# Altium PCB ORD_PCB.PcbDoc
Units mm, origin at the board's own origin, x right, y up, seen from the top; angles counter-clockwise.
Board outline 90 x 60 mm, 2 copper layers (Top Layer, Bottom Layer); 130 components, 93 nets, 389 pads, 0 vias.
Unrouted connection lines stored in the file: 263.
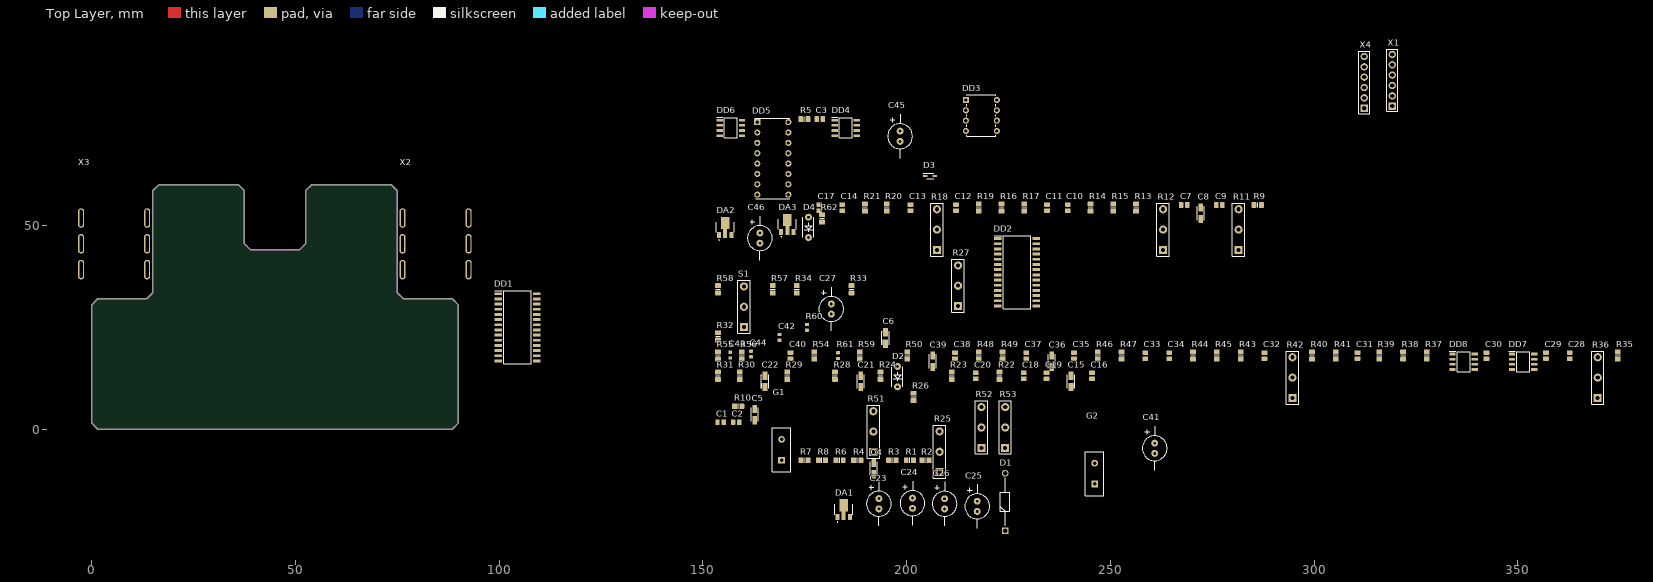
[diagram p0: Top Layer view]
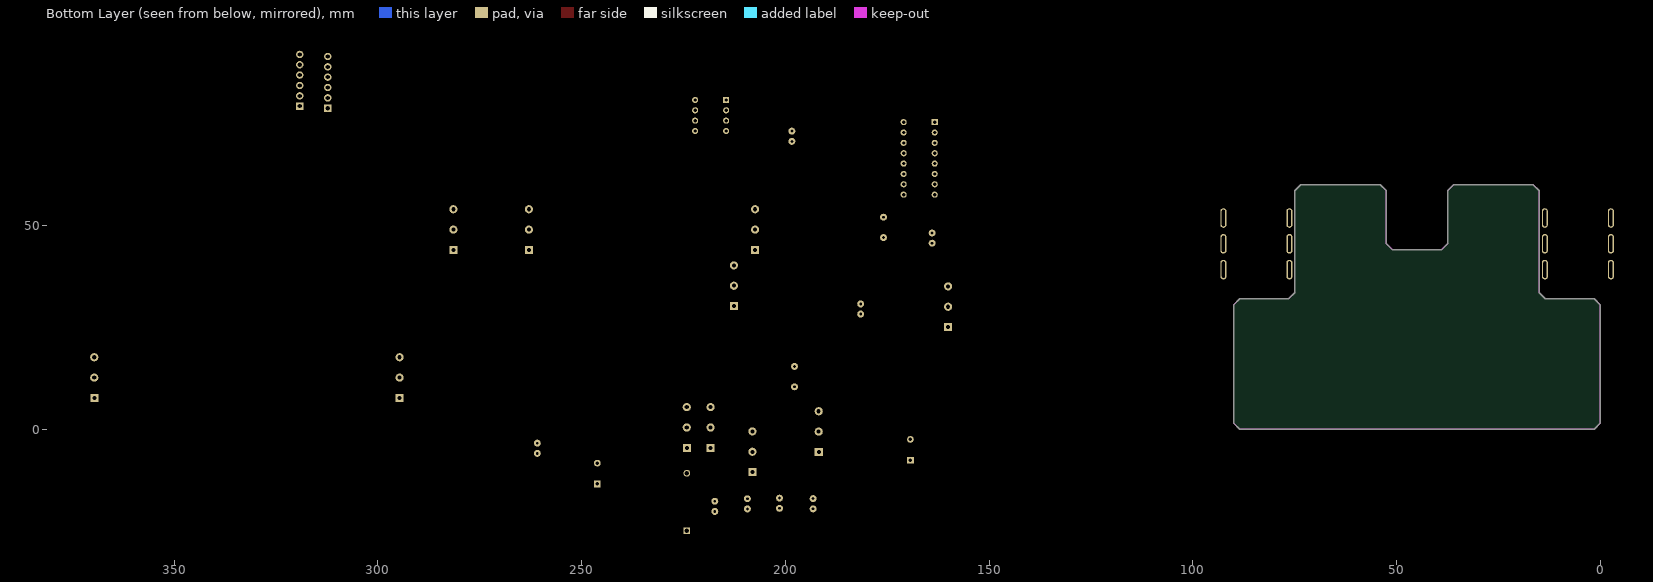
[diagram p1: Bottom Layer view, seen from below]

## Layer stack, top to bottom
Top Solder: solder mask 0.0102, Solder Resist, Dk 3.5
Top Layer: signal copper 0.0356
Dielectric 1: dielectric 0.32, FR-4, Dk 4.8
Bottom Layer: signal copper 0.0356
Bottom Solder: solder mask 0.0102, Solder Resist, Dk 3.5

## Board outline
1.5,0 0,1.5 0,30.5 1.5,32 13.5,32 15,33.5 15,58.5 16.5,60 36,60 37.5,58.5 37.5,45.5 39,44 51,44 52.5,45.5 52.5,58.5 54,60 73.5,60 75,58.5 75,33.5 76.5,32 88.5,32 90,30.5 90,1.5 88.5,0

## Design rules (kind name [scope] priority, off if disabled: settings)
Clearance [All] p1: gap=0.254 ignorepadtopadclearanceinfootprint=FALSE except(0: Arc-Hole Track-Hole SMDPad-Hole THPad-Hole Via-Hole Fill-Hole Poly-Hole Region-Hole Text-Hole)
PolygonConnect [All] p1: connectstyle=Relief reliefconductorwidth=0.254 reliefentries=4 polygonreliefangle="90 Angle" airgapwidth=0.254
RoutingVias [All] p1: holewidth=0.711 width=1.27 viastyle="Through Hole" minholewidth=0.711 minwidth=1.27 maxholewidth=0.711 maxwidth=1.27
SolderMaskExpansion [All] p1: expansion=0.102
Width [All] p1: maxlimit=0.254 minlimit=0.254 preferedwidth=0.254
30 further rules are at their usual default settings.

## Classes and differential pairs
component class ORD_CONNECTORS: X1 X2 X3 X4
component class ORD_PT2399: C1 C2 C3 C4 C5 C6 C7 C8 C9 C10 C11 C12 C13 C14 C15 C16 C17 C18 C19 C20 C21 C22 DD4 DD5 DD6 R1 R2 R3 R4 R5 R6 R7 R8 R9 R10 R11 R12 R13 R14 R15 R16 R17 R18 R19 R20 R21 R22 R23 R24 R25 R26 R27 R28 R29 R30 R31 R32
component class ORD_POWER: C23 C24 C25 C26 C27 C41 C45 C46 D1 D4 DA1 DA2 DA3 R33 R34 R57 R58 R62
component class ORD_FV1: C28 C29 C30 C31 C32 C33 C34 C35 C36 C37 C38 C39 C40 D3 DD2 DD3 DD7 DD8 G1 R35 R36 R37 R38 R39 R40 R41 R42 R43 R44 R45 R46 R47 R48 R49 R50 R51 R52 R53 R54 R55 R56 S1
component class ORD_CH341A: C42 C43 C44 D2 DD1 G2 R59 R60 R61

## Components (designator, comment, footprint, x,y, rotation, side; value= is the part's Value field where it differs from the comment)
C1 "47 pF" C0805[2012] 154.34,1.686 r0 top
C2 "100 pF" C0805[2012] 158.15,1.686 r0 top
C3 "22 nF" C0805[2012] 178.724,76.108 r0 top
C4 "1 uF" C3216_CASE-A 191.932,-9.657 r90 top
C5 "1 uF" C3216_CASE-A 162.722,3.591 r90 top
C6 "1 uF" C3216_CASE-A 194.853,22.387 r90 top
C7 "4.7 nF" C0805[2012] 268.132,55.026 r0 top
C8 "1 uF" C3216_CASE-A 272.196,52.994 r90 top
C9 "47 nF" C0805[2012] 276.768,55.026 r0 top
C10 "2.2 nF" C0805[2012] 239.557,54.391 r90 top
C11 "22 nF" C0805[2012] 234.477,54.391 r90 top
C12 "2.2 nF" C0805[2012] 212.125,54.391 r90 top
C13 "100 nF" C0805[2012] 200.949,54.391 r90 top
C14 "100 nF" C0805[2012] 184.185,54.391 r90 top
C15 "47 uF" C3216_CASE-A 240.319,11.719 r90 top
C16 "100 nF" C0805[2012] 245.526,13.116 r90 top
C17 "100 nF" C0805[2012] 178.597,54.391 r90 top
C18 "10 nF" C0805[2012] 228.762,13.116 r90 top
C19 "10 nF" C0805[2012] 234.35,13.116 r90 top
C20 "10 nF" C0805[2012] 216.951,13.116 r90 top
C21 "4.7 uF" C3216_CASE-A 188.757,11.719 r90 top
C22 "10 uF" C3216_CASE-A 165.262,11.719 r90 top
C23 "100 uF" K50-35 193.202,-18.293 r90 top
C24 "100 uF" K50-35 201.457,-18.166 r90 top
C25 "100 uF" K50-35 217.332,-18.928 r90 top
C26 "100 uF" K50-35 209.331,-18.313 r90 top
C27 "47 uF" K50-35 181.518,29.499 r90 top
C28 "470 pF" C0805[2012] 362.747,18.069 r90 top
C29 "220 pF" C0805[2012] 356.905,18.069 r90 top
C30 "1 uF" C0805[2012] 342.3,18.069 r90 top
C31 "1 uF" C0805[2012] 310.677,18.069 r90 top
C32 "1 uF" C0805[2012] 287.817,18.069 r90 top
C33 "1 uF" C0805[2012] 258.607,18.069 r90 top
C34 "1 uF" C0805[2012] 264.449,18.069 r90 top
C35 "100 nF" C0805[2012] 241.081,18.069 r90 top
C36 "1 uF" C3216_CASE-A 235.62,16.672 r90 top
C37 "2.2 nF" C0805[2012] 229.397,18.069 r90 top
C38 "1 nF" C0805[2012] 211.871,18.069 r90 top
C39 "1 uF" C3216_CASE-A 206.41,16.672 r90 top
C40 "15 pF" C0805[2012] 171.485,18.069 r90 top
C41 "47 uF" K50-35 260.893,-4.684 r90 top
C42 "4.7 nF" C0603[1608] 168.818,22.514 r90 top
C43 "32 pF" C0603[1608] 156.753,18.196 r90 top
C44 "32 pF" C0603[1608] 161.833,18.45 r90 top
C45 "100 uF" K50-35 198.409,71.897 r90 top
C46 "100 uF" K50-35 163.992,46.898 r90 top
D1 "1N4007" DIOAD1410W90L470D235 224.19,-24.9 r90 top
D2 "Led" LED 197.774,15.477 r90 top
D3 "BAT60A" SOD323 205.775,62.138 r0 top
D4 "Led" LED 175.93,52.105 r90 top
DA1 "L78L05ABUTR" SOT-89 184.566,-19.944 r0 top
DA2 "L78L33ABUTR" SOT-89 155.483,49.311 r0 top
DA3 "L78L33ABUTR" SOT-89 170.723,50.073 r0 top
DD1 "CH341A" SOIC28 104.5,25 r0 top
DD2 "FV-1" SOIC28 227.102,38.516 r0 top
DD3 "24LC32A" DIP8_WITH_SOCKET 222.158,73.187 r0 top
DD4 "TL072CDR" SO8 185.074,73.949 r0 top
DD5 "PT2399" DIP16_with_Socket 167.167,66.456 r0 top
DD6 "LM358DT" SO8 156.88,73.949 r0 top
DD7 "TL072CDR" SO8 351.317,16.545 r0 top
DD8 "TL072CDR" SO8 336.712,16.545 r0 top
G1 "32768 MHz" HC-49 169.326,-7.605 r90 top
G2 "12.000 MHz" HC-49 246.161,-13.427 r90 top
R1 "360 kOhm" R0805[2012] 200.822,-7.625 r0 top
R2 "12 kOhm" R0805[2012] 204.632,-7.625 r0 top
R3 "180 kOhm" R0805[2012] 196.504,-7.625 r0 top
R4 "22 kOhm" R0805[2012] 187.868,-7.625 r0 top
R5 "1 MOhm" R0805[2012] 174.914,76.108 r0 top
R6 "1 kOhm" R0805[2012] 183.55,-7.625 r0 top
R7 "22 kOhm" R0805[2012] 174.914,-7.625 r0 top
R8 "100 kOhm" R0805[2012] 179.232,-7.625 r0 top
R9 "2.2 kOhm" R0805[2012] 286.166,55.026 r0 top
R10 "15 kOhm" R0805[2012] 158.658,5.623 r0 top
R11 "B50K" 16K1 281.467,43.977 r90 top
R12 "B50K" 16K1 262.925,43.977 r90 top
R13 "10 kOhm" R0805[2012] 256.321,54.391 r90 top
R14 "10 kOhm" R0805[2012] 245.145,54.391 r90 top
R15 "1 kOhm" R0805[2012] 250.733,54.391 r90 top
R16 "22 kOhm" R0805[2012] 223.301,54.391 r90 top
R17 "5.1 kOhm" R0805[2012] 228.889,54.391 r90 top
R18 "B50K" 16K1 207.426,43.977 r90 top
R19 "10 kOhm" R0805[2012] 217.713,54.391 r90 top
R20 "10 kOhm" R0805[2012] 195.107,54.391 r90 top
R21 "1 kOhm" R0805[2012] 189.773,54.391 r90 top
R22 "220 kOhm" R0805[2012] 222.793,13.116 r90 top
R23 "120 kOhm" R0805[2012] 211.109,13.116 r90 top
R24 "4.7 kOhm" R0805[2012] 193.583,13.116 r90 top
R25 "B50K" 16K1 208.061,-10.546 r90 top
R26 "100 kOhm" R0805[2012] 201.711,7.909 r90 top
R27 "B100K" 16K1 212.608,30.214 r90 top
R28 "4.7 kOhm" R0805[2012] 182.407,13.116 r90 top
R29 "220 kOhm" R0805[2012] 170.723,13.116 r90 top
R30 "220 kOhm" R0805[2012] 159.039,13.116 r90 top
R31 "120 kOhm" R0805[2012] 153.705,13.116 r90 top
R32 "0 Ohm" R0805[2012] 153.705,22.768 r90 top
R33 "10 kOhm" R0805[2012] 186.471,34.325 r90 top
R34 "10 kOhm" R0805[2012] 173.009,34.325 r90 top
R35 "22 kOhm" R0805[2012] 374.558,18.069 r90 top
R36 "B100K" 16K1 369.605,7.655 r90 top
R37 "100 Ohm" R0805[2012] 327.695,18.069 r90 top
R38 "15 kOhm" R0805[2012] 321.853,18.069 r90 top
R39 "100 kOhm" R0805[2012] 316.011,18.069 r90 top
R40 "15 kOhm" R0805[2012] 299.501,18.069 r90 top
R41 "15 kOhm" R0805[2012] 305.343,18.069 r90 top
R42 "B10K" 16K1 294.675,7.655 r90 top
R43 "100 kOhm" R0805[2012] 281.975,18.069 r90 top
R44 "15 kOhm" R0805[2012] 270.291,18.069 r90 top
R45 "15 kOhm" R0805[2012] 276.133,18.069 r90 top
R46 "1 kOhm" R0805[2012] 246.923,18.069 r90 top
R47 "1 kOhm" R0805[2012] 252.765,18.069 r90 top
R48 "1 MOhm" R0805[2012] 217.713,18.069 r90 top
R49 "1 MOhm" R0805[2012] 223.555,18.069 r90 top
R50 "100 Ohm" R0805[2012] 200.187,18.069 r90 top
R51 "B10K" 16K1 191.805,-5.593 r90 top
R52 "B10K" 16K1 218.348,-4.577 r90 top
R53 "B10K" 16K1 224.19,-4.577 r90 top
R54 "1 kOhm" R0805[2012] 177.327,18.069 r90 top
R55 "10 kOhm" R0805[2012] 153.705,18.069 r90 top
R56 "10 kOhm" R0805[2012] 159.547,18.069 r90 top
R57 "10 kOhm" R0805[2012] 167.167,34.325 r90 top
R58 "10 kOhm" R0805[2012] 153.705,34.325 r90 top
R59 "2.2 kOhm" R0805[2012] 188.503,18.069 r90 top
R60 "0 Ohm" R0603[1608] 175.549,24.992 r90 top
R61 "300 Ohm" R0603[1608] 183.169,18.069 r90 top
R62 "300 Ohm" R0805[2012] 179.232,51.724 r90 top
S1 "MTS-103" MTS-103 160.055,25.054 r90 top
X1 "Bypass Delay" "BYPASS PANEL" 319.186,79.283 r90 top
X2 "Audio Jack 6.35 mm" "audio jack" 84.4,45.5 r0 top
X3 "Audio Jack 6.35 mm" "audio jack" 5.5,45.5 r0 top
X4 "Bypass Reverb" "BYPASS PANEL" 312.328,78.775 r90 top

## Footprints (in the part's own frame and the unit in brackets; to place one, negate y for a bottom-side part, rotate by r counter-clockwise, add the part's x,y. Pads: shape width x height; smd on the part's side, far side on the other; paste and mask are expansions set on the pad)
16K1 [mm]
  rect 2x2 hole 1: 1(0,0)
  round 2 hole 1: 2(5,-0.025) 3(10,-0.025)
  silkscreen extent -1.5,-1.55 11.5,1.5
"audio jack" [mm] "Audio Jack 6.35 mm"
  oval 1.5x4.8 hole 0.7 slot 4 at 90 deg: 1(-8.1,6.33) 2(8.1,6.33) 3(-8.1,0) 4(8.1,0) 5(-8.1,-6.33) 6(8.1,-6.33)
  body extent -9.1,-13.28 9.1,18.51, height 15.94
"BYPASS PANEL" [mm]
  rect 1.8x1.8 hole 1: 1(0,0)
  round 1.8 hole 1: 2(2.54,0) 3(5.08,0) 4(7.62,0) 5(10.16,0) 6(12.7,0)
  silkscreen extent -1.3,-1.3 13.95,1.3
C0603[1608] [mm] "Capacitor C0603[1608]"
  rrect25% 0.8x0.9 smd: 1(-0.7,0) 2(0.7,0)
  body extent -0.8,-0.4 0.8,0.4, height 0.8
C0805[2012] [mm] "Capacitor C0805[2012]"
  rrect25% 1.1x1.4 smd: 1(-0.75,0) 2(0.75,0)
  body extent -1,-0.62 1,0.63, height 0.9
C3216_CASE-A [mm] "Capacitor, SM Tantalum; Body 3.2 x 1.6 mm (LxW typ)"
  rect 2x1.2 smd: 1(-1.4,0) 2(1.4,0)
  silkscreen extent -1.7,-0.9 1.7,0.9, body extent -1.7,-0.84 1.7,0.84, height 1.71
DIOAD1410W90L470D235 [mm]
  rect 1.65x1.65 / inner round 1.65 / far side rect 1.65x1.65 hole 1.1: 1(0,0)
  round 1.65 hole 1.1: 2(14.1,0)
  silkscreen extent 1.17,-1.17 12.93,1.17, body extent -0.45,-1.35 14.55,1.35, height 2.69
DIP8_WITH_SOCKET [mm]
  rect 1.5x1.5 hole 0.8: 1(-7.62,7.62)
  round 1.5 hole 0.8: 2(-7.62,5.08) 3(-7.62,2.54) 4(-7.62,0) 5(0,0) 6(0,2.54) 7(0,5.08) 8(0,7.62)
  silkscreen extent -7.37,-1.27 -0.25,8.89, body extent -8.76,-1.21 1.14,8.89, height 7.36
DIP16_with_Socket [mm]
  rect 1.5x1.5 hole 0.8: 1(-3.81,8.89)
  round 1.5 hole 0.8: 2(-3.81,6.35) 3(-3.81,3.81) 4(-3.81,1.27) 5(-3.81,-1.27) 6(-3.81,-3.81) 7(-3.81,-6.35) 8(-3.81,-8.89) 9(3.81,-8.89) 10(3.81,-6.35) 11(3.81,-3.81) 12(3.81,-1.27) 13(3.81,1.27) 14(3.81,3.81) 15(3.81,6.35) 16(3.81,8.89)
  silkscreen extent -4.39,-9.84 4.13,9.84, body extent -5.31,-10.25 5.19,10.16, height 7.78
HC-49 [mm]
  rect 1.65x1.65 / inner round 1.65 / far side rect 1.65x1.65 hole 0.9: 1(0,0)
  round 1.65 hole 0.9: 2(5.1,0)
  silkscreen extent -2.85,-2.27 7.95,2.27, body extent -2.86,-2.25 7.94,2.25, height 3.5
K50-35 [mm]
  round 1.7 hole 0.7: 1(-1.25,0) 2(1.25,0)
  silkscreen extent -5.38,-3.05 5.38,3.05, body extent -3.18,-3.15 3.13,3.15, height 7.5
LED [mm]
  round 1.7 hole 0.7: 1(-5.075,0) 2(-0.075,0)
  silkscreen extent -5,-1.32 -0.15,1.4
MTS-103 [mm] "Switch ON-OFF-ON"
  rect 2x2 hole 1: 1(0,0)
  round 2 hole 1: 2(5,-0.025) 3(10,-0.025)
  silkscreen extent -1.5,-1.55 11.5,1.5
R0603[1608] [mm] "Resistor R0603[1608]"
  rrect25% 0.8x0.9 smd: 1(-0.7,0) 2(0.7,0)
  body extent -0.8,-0.4 0.8,0.4, height 0.45
R0805[2012] [mm] "Resistor R0805[2012]"
  rrect25% 1.2x1.4 smd: 1(-0.9,0) 2(0.9,0)
  silkscreen extent 0,-0.6 0,0.6, body extent -1,-0.62 1,0.63, height 0.6
SO8 [mm]
  rect 1.525x0.65 smd: 1(-2.712,1.905) 2(-2.712,0.635) 3(-2.712,-0.635) 4(-2.712,-1.905) 5(2.712,-1.905) 6(2.712,-0.635) 7(2.712,0.635) 8(2.712,1.905)
  silkscreen extent -3.47,-2.45 1.6,2.58, body extent -3,-2.45 3,2.45, height 1.75
SOD323 [mm]
  rect 1.1x0.5 smd: 1(-1.15,0) 2(1.15,0)
  silkscreen extent -1.7,-0.63 0.85,0.63, body extent -1.25,-0.63 1.25,0.62, height 0.99
SOIC28 [mm]
  rect 1.87x0.7 smd: 1(-4.69,8.255) 2(-4.69,6.985) 3(-4.69,5.715) 4(-4.69,4.445) 5(-4.69,3.175) 6(-4.69,1.905) 7(-4.69,0.635) 8(-4.69,-0.635) 9(-4.69,-1.905) 10(-4.69,-3.175) 11(-4.69,-4.445) 12(-4.69,-5.715) 13(-4.69,-6.985) 14(-4.69,-8.255) 15(4.69,-8.255) 16(4.69,-6.985) 17(4.69,-5.715) 18(4.69,-4.445) 19(4.69,-3.175) 20(4.69,-1.905) 21(4.69,-0.635) 22(4.69,0.635) 23(4.69,1.905) 24(4.69,3.175) 25(4.69,4.445) 26(4.69,5.715) 27(4.69,6.985) 28(4.69,8.255)
  silkscreen extent -5.63,-8.94 3.4,8.96, body extent -5.15,-8.95 5.15,8.95, height 2.65
SOT-89 [mm]
  rect 1x1.5 smd: 1(-1.5,-1.65) 3(1.5,-1.65)
  rect 1x2.2 smd: 2(0,-1.3)
  rect 2x3 smd: 4(0,1.3)
  silkscreen extent -2.25,-2.9 2.25,1.5, body extent -2.25,-1.6 2.25,2.7, height 1.51

## Part data
C1 C2 C3 C7 C9 C10 C11 C12 C13 C14 C16 C17 C18 C19 C20 C28 C29 C30 C31 C32 C33 C34 C35 C37 C38 C40 C42 C43 C44: library part Capacitor
C4 C5 C6 C8 C15 C21 C22 C23 C24 C25 C26 C27 C36 C39 C41 C45 C46: library part Capacitor_Pol
D3: "Diode Schottky 10V 3A Automotive 2-Pin SOD-323 T/R", Arrow Part Number=BAT60A, Manufacturer_Part_Number=BAT60A
DA1: "Standard Regulator Pos 5V 0.1A L78L05ABUTR, Single Linear Voltage Regulator, 100mA 5 V, 3-Pin SOT-89", Manufacturer_Name="New Japan Radio", Manufacturer_Part_Number=NJM78L05UA-TE1, RS Part Number=7139502P, Allied_Number=R1030699, Allied Price/Stock=https://www.alliedelec.com/new-japan-radio-njm78l05ua-te1/R1030699/, Datasheet Link=http://uk.rs-online.com/web/p/products/7139502, RS Price/Stock=http://uk.rs-online.com/web/p/products/7139502P
DA2 DA3: "Standard Regulator Pos 3.3V 0.1A L78L33ABUTR, Single Linear Voltage Regulator, 100mA 3.3 V, 3-Pin SOT-89", Manufacturer_Name="New Japan Radio", Manufacturer_Part_Number=NJM78L05UA-TE1, RS Part Number=7139502P, Allied_Number=R1030699, Allied Price/Stock=https://www.alliedelec.com/new-japan-radio-njm78l05ua-te1/R1030699/, Datasheet Link=http://uk.rs-online.com/web/p/products/7139502, RS Price/Stock=http://uk.rs-online.com/web/p/products/7139502P
DD1: "USB Bus Convert Chip CH341A", Manufacturer_Name="Spin Semiconductor", Manufacturer_Part_Number="FV-1 Reverb IC", Datasheet Link=http://www.spinsemi.com/Products/datasheets/spn1001/FV-1.pdf, Geometry.Height=2.51mm
DD2: "FV-1 Reverb IC, Integrated Stereo ADC & DAC, Integrated Circuit, SOIC-28 300 MIL", Manufacturer_Name="Spin Semiconductor", Manufacturer_Part_Number="FV-1 Reverb IC", Datasheet Link=http://www.spinsemi.com/Products/datasheets/spn1001/FV-1.pdf, Geometry.Height=2.51mm
DD3: "32K I2C Serial EEPROM with Quarter-Array Write-Protect", Manufacturer_Name=Microchip, Manufacturer_Part_Number=24LC32AF-I/P, Mouser Part Number=579-24LC32AF-I/P, Allied_Number=70570177, Allied Price/Stock=https://www.alliedelec.com/microchip-technology-inc-24lc32af-i-p/70570177/, Mouser Price/Stock=https://www.mouser.com/Search/Refine.aspx?Keyword=579-24LC32AF-I%2FP
DD4 DD7 DD8: "TL072CDR, Dual Operational Amplifier 4 MHz -18 to 18V, 8-Pin SO", Manufacturer_Name=STMicroelectronics, Manufacturer_Part_Number=LM358DT, Mouser Part Number=511-LM358DT, RS Part Number=7140827P, Allied_Number=70013708, Allied Price/Stock=http://www.alliedelec.com/stmicroelectronics-lm358dt/70013708/, Datasheet Link=http://www.st.com/st-web-ui/static/active/en/resource/technical/document/datasheet/CD00000464.pdf, Geometry.Height=1.75mm, Mouser Price/Stock=https://www.mouser.com/Search/Refine.aspx?Keyword=511-LM358DT, RS Price/Stock=http://uk.rs-online.com/web/p/products/7140827P
DD5: "Echo Processor IC", Manufacturer_Name="Princeton Technology Corp", Datasheet Link=http://www.princeton.com.tw/Portals/0/Product/PT2399_1.pdf, Geometry.Height=5.33mm, Manufacturer_Part_Number=PT2399
DD6: "LM358DT, Dual Operational Amplifier 1.1MHz 5 to 28V, 8-Pin SO", Manufacturer_Name=STMicroelectronics, Mouser Part Number=511-LM358DT, RS Part Number=7140827P, Allied_Number=70013708, Allied Price/Stock=http://www.alliedelec.com/stmicroelectronics-lm358dt/70013708/, Datasheet Link=http://www.st.com/st-web-ui/static/active/en/resource/technical/document/datasheet/CD00000464.pdf, Geometry.Height=1.75mm, Manufacturer_Part_Number=LM358DT, Mouser Price/Stock=https://www.mouser.com/Search/Refine.aspx?Keyword=511-LM358DT, RS Price/Stock=http://uk.rs-online.com/web/p/products/7140827P
G1 G2: library part Crystal_2pin
R1 R2 R3 R4 R5 R6 R7 R8 R9 R10 R13 R14 R15 R16 R17 R19 R20 R21 R22 R23 R24 R26 R28 R29 R30 R31 R32 R33 R34 R35 R37 R38 R39 R40 R41 R43 R44 R45 R46 R47 R48 R49 R50 R54 R55 R56 R57 R58 R59 R60 R61 R62: library part Resistor
R11 R12 R18 R25 R27 R36 R42 R51 R52 R53: library part "16K1-B (Pot)"
S1: "Switch, ON-OFF-ON"
X1 X4: library part Bypass, "Rele or 3PDT"
X2 X3: library part "Audio Jack"
D1: Geometry.Height=1.35mm, Manufacturer_Name=1N4007, Manufacturer_Part_Number=1N4007

## Nets (pads, with @x,y where several pads share a name; then routed paths per layer and width w, separated by ;. In a path a pad name is that pad's centre, name@x,y a point inside that pad or via, vN(x,y) a via of type N, cw(c..) or ccw(c..) an arc to the next point about the centre after c; other vN are vias at no path point)
3V3: C26.1 D3.1 DA2.1 DD2.6 DD2.8 DD2.23 DD3.8 R50.1 R51.3 R52.3 R53.3 R54.2 S1.2
3V3_USB: C46.1 D2.1 D3.2 DA3.1
4V5: DD4.3 DD4.5
4V5_DBD: C27.1 R33.1 R34.2
4V5_FV1: C41.1 DD7.3 DD8.3 R42.2 R43.1 R49.1 R57.1 R58.2
5V0: C24.1 DA1.1 DD5.1
5V0_USB: C45.1 DA3.3 DD1.28 R62.2
9V0: C23.1 C25.1 D1.1 DA1.3 DA2.3 DD4.8 DD6.8 DD7.4 DD8.4 R23.1 R33.2 R57.2
CNTRL_0: DD2.20 R51.2
CNTRL_1: DD2.21 R52.2
CNTRL_2: DD2.22 R53.2
GND: C7.1 C9.2 C15.2 C16.1 C17.1 C18.2 C19.2 C22.2 C23.2 C24.2 C25.2 C26.2 C27.2 C36.2 C37.1 C38.1 C39.2 C40.2 C41.2 C42.1 C43.1 C44.1 C45.2 C46.2 D1.2 D4.2 DA1.2 DA1.4 DA2.2 DA2.4 DA3.2 DA3.4 DD1.12 DD2.4 DD2.7 DD2.11 DD2.12 DD2.18 DD2.19 DD2.24 DD2.25 DD3.1 DD3.2 DD3.3 DD3.4 DD3.7 DD4.4 DD5.3 DD5.4 DD6.4 DD7.8 DD8.8 R5.1 R8.2 R11.1 R12.1 R21.1 R27.3 R29.2 R34.1 R39.1 R48.1 R51.1 R52.1 R53.1 R55.1 R56.1 R58.1 R59.1 R60.2 X2.1 X2.2 X3.1 X3.2
IN: X1.1 X2.5
IN_DELAY: C3.1 R5.2 X1.2
IN_FV1: C35.1 R48.2 X1.5 X4.2
LFO: C21.2 R27.2
MOD: R18.2 R18.3 R21.2 R28.2
NetC1_1: C1.1 DD4.2 R1.2 R3.1
NetC1_2: C1.2 C5.1 DD4.1 R1.1 R4.2
NetC2_1: C2.1 DD4.6 R2.2 R4.1 R7.1
NetC2_2: C2.2 C4.1 DD4.7 R2.1
NetC3_2: C3.2 R3.2
NetC4_2: C4.2 R6.2
NetC5_2: C5.2 R10.1
NetC6_1: C6.1 R7.2
NetC6_2: C6.2 R11.2
NetC7_2: C7.2 R10.2 R13.2 R14.2 R17.1
NetC8_1: C8.1 C19.1 R15.2
NetC8_2: C8.2 R9.1 R11.3
NetC9_1: C9.1 R9.2 R12.2
NetC10_1: C10.1 DD5.15 R14.1
NetC10_2: C10.2 DD5.16 R13.1
NetC11_1: C11.1 R17.2
NetC11_2: C11.2 R12.3
NetC12_1: C12.1 DD5.13 R19.1
NetC12_2: C12.2 DD5.14 R15.1 R16.1
NetC13_1: C13.1 DD5.12 R20.1
NetC13_2: C13.2 DD5.11
NetC14_1: C14.1 DD5.10
NetC14_2: C14.2 DD5.9
NetC15_1: C15.1 DD5.2
NetC16_2: C16.2 DD5.7
NetC17_2: C17.2 DD5.8
NetC18_1: C18.1 R16.2 R19.2 R20.2
NetC20_1: C20.1 DD6.2 R22.1
NetC20_2: C20.2 DD6.1 R24.1 R30.2
NetC21_1: C21.1 R28.1
NetC22_1: C22.1 R22.2 R25.3 R26.1
NetC28_1: C28.1 DD7.1 R35.2 R37.1
NetC28_2: C28.2 DD7.2 R35.1 R38.2
NetC29_1: C29.1 DD8.1 R36.2 R36.3 R38.1
NetC29_2: C29.2 DD8.2 R36.1 R41.1 R45.1
NetC30_2: C30.2 R37.2
NetC31_1: C31.1 DD7.6
NetC31_2: C31.2 R40.2
NetC32_1: C32.1 DD8.6 DD8.7
NetC32_2: C32.2 R44.2
NetC33_1: C33.1 DD7.7
NetC33_2: C33.2 R46.2
NetC34_1: C34.1 DD2.28
NetC34_2: C34.2 R47.2
NetC35_2: C35.2 DD7.5 R49.2
NetC36_1: C36.1 DD2.3
NetC37_2: C37.2 DD8.5 R43.2 R47.1
NetC38_2: C38.2 DD2.1 DD2.2 R46.1
NetC39_1: C39.1 DD2.26 R50.2
NetC40_1: C40.1 DD2.9 G1.1
NetC42_2: C42.2 DD1.9
NetC43_2: C43.2 DD1.13 G2.1
NetC44_2: C44.2 DD1.14 G2.2
NetD2_2: D2.2 R61.2
NetD4_1: D4.1 R62.1
NetDD1_1: DD1.1 R59.2
NetDD1_27: DD1.27 R60.1
NetDD2_10: DD2.10 G1.2
NetDD2_13: DD2.13 R54.1
NetDD2_16: DD2.16 R55.2 S1.3
NetDD2_17: DD2.17 R56.2 S1.1
NetDD5_6: DD5.6 R32.1
NetDD6_3: DD6.3 R23.2 R29.1 R30.1 R31.1
NetDD6_5: DD6.5 R26.2 R31.2
NetDD6_6: DD6.6 DD6.7 R27.1
NetR18_1: R18.1 R32.2
NetR24_2: R24.2 R25.1 R25.2
NetR40_1: R40.1 R41.2 R42.3
NetR42_1: R42.1 R44.1 R45.2
OUT: X3.5 X4.5
OUT_DELAY: R6.1 R8.1 X1.6 X4.1
OUT_FV1: C30.1 R39.2 X4.6
SCL: DD1.24 DD2.14 DD3.6
SDA: DD1.23 DD2.15 DD3.5 R61.1
USB_N: DD1.11
USB_P: DD1.10
pads on no net: DD1.2 DD1.3 DD1.4 DD1.5 DD1.6 DD1.7 DD1.8 DD1.15 DD1.16 DD1.17 DD1.18 DD1.19 DD1.20 DD1.21 DD1.22 DD1.25 DD1.26 DD2.5 DD2.27 DD5.5 X1.3 X1.4 X2.3 X2.4 X2.6 X3.3 X3.4 X3.6 X4.3 X4.4

## Keep-outs
Keep-Out Layer:
  the board outline again, w0.1